# Altium PCB MainBoard.PcbDoc (part 2 of 5)
Units mm, origin at the board's own origin, x right, y up, seen from the top; angles counter-clockwise.
Board outline 82.5 x 82.5 mm, 2 copper layers (Top Layer, Bottom Layer); 145 components, 141 nets, 702 pads, 289 vias.
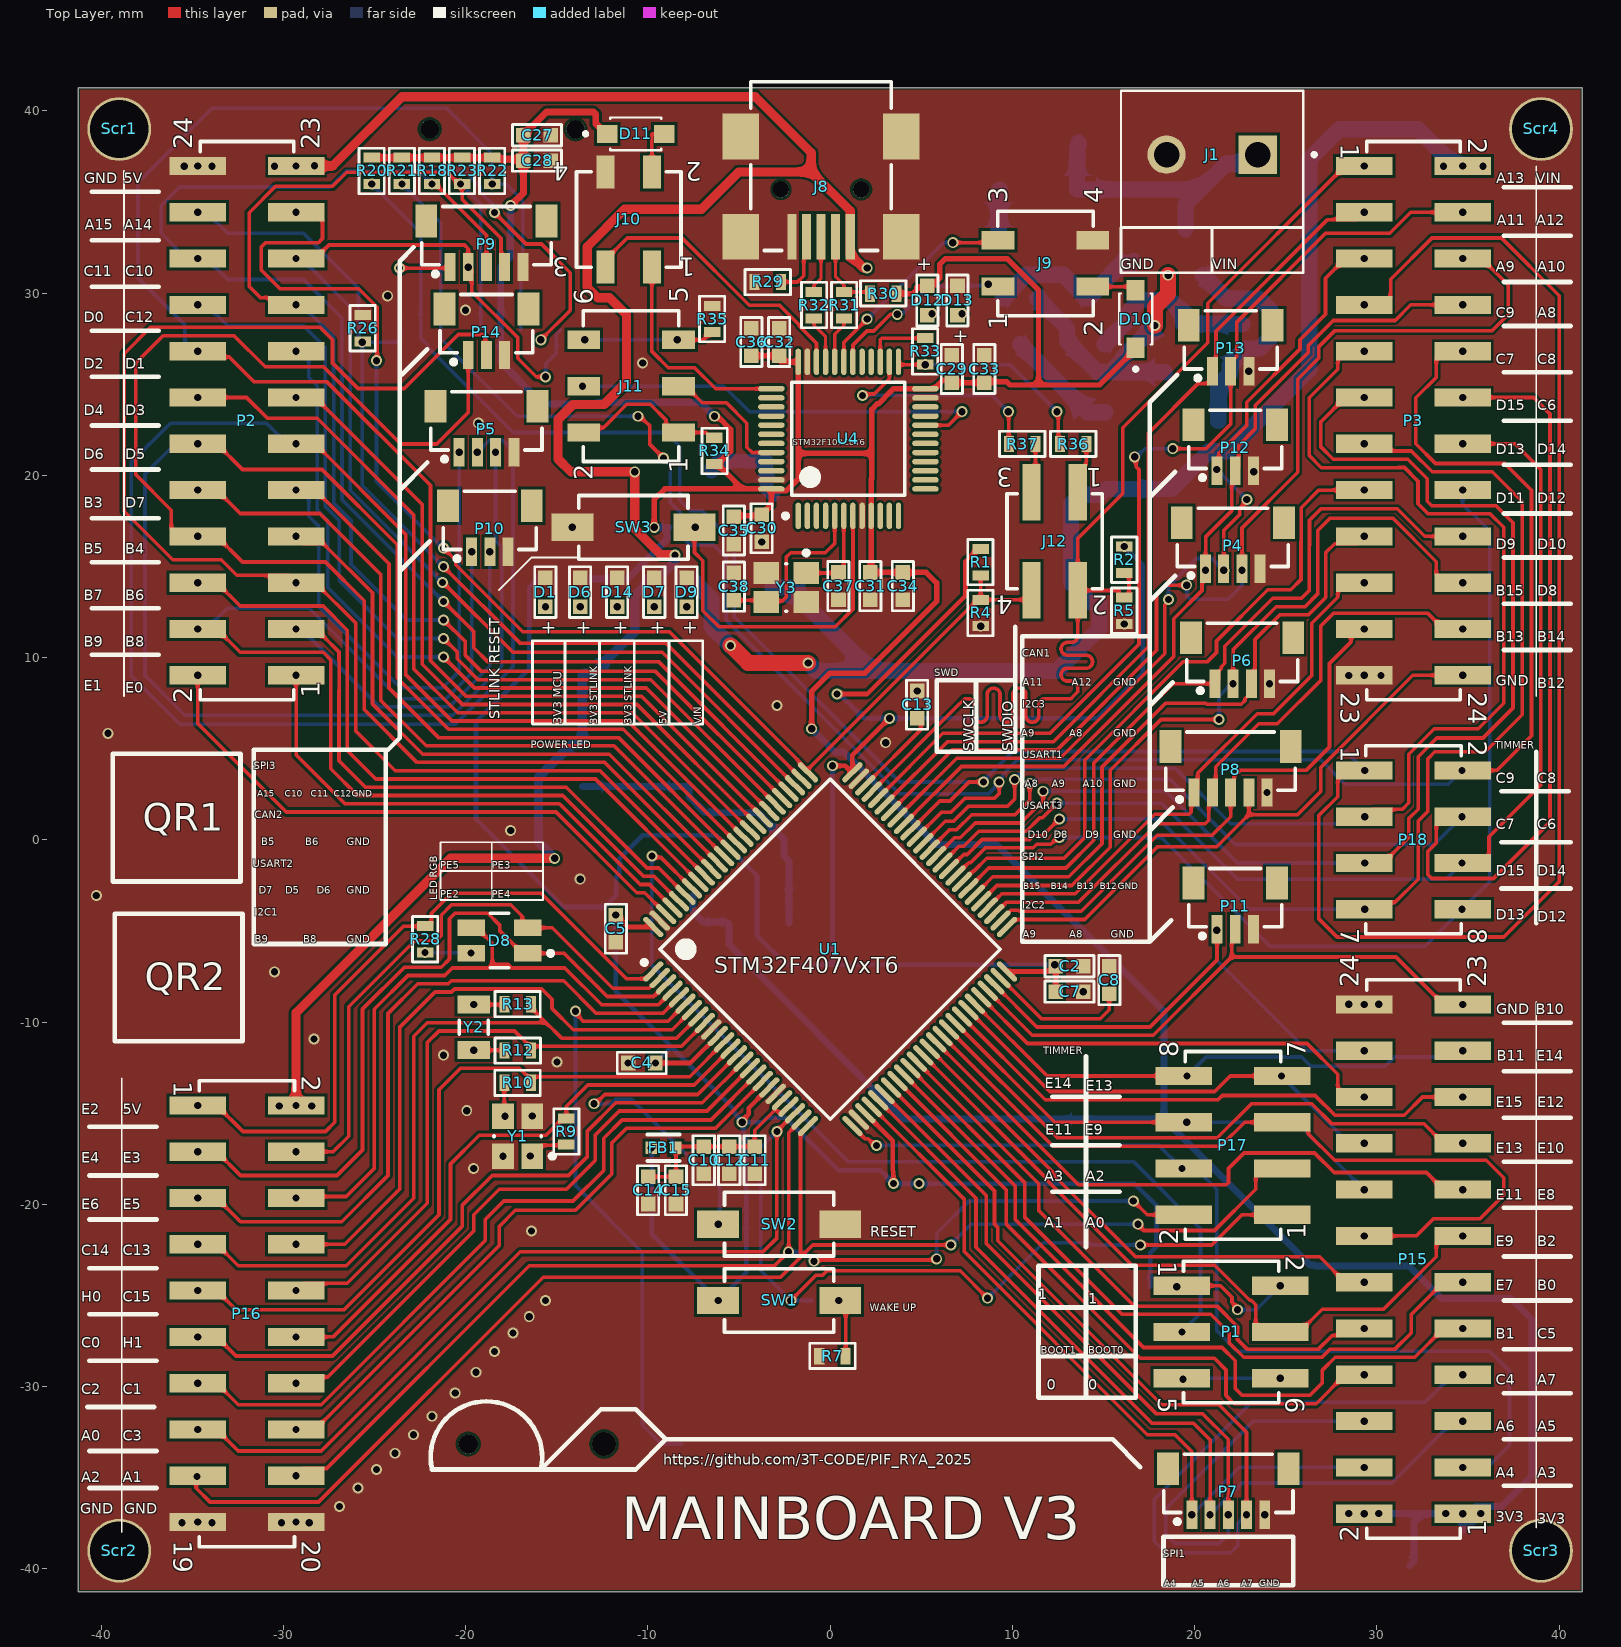
[diagram p0: Top Layer view]

## Part data (continued)
D14: library part CMP-004-00093-1, "WL-SMCW SMT Mono-color Chip LED Blur, size 0603, Red, 2V, 140deg", Color=Red, Component Type=Standard, ComponentLink1Description="Datasheet link", ComponentLink1URL=N/A, ComponentLink2Description="Supplier 1 URL", ComponentLink2URL=https://www.mouser.vn/ProductDetail/ROHM-Semiconductor/CSL1901VW1?qs=vvQtp7zwQdNmrXZcE27xEA%3D%3D, ComponentLink3Description="Supplier 2 URL", ComponentLink3URL=https://www.digikey.com/en/products/detail/rohm-semiconductor/SML-D12U8WT86/1641799, ComponentLink4Description="Supplier 3 URL", ComponentLink4URL=N/A, Design Item ID=160603RedBlur, Pins=2, Size=0603, Source=WL-SMCW_0603.SchLib, Supplier 1 Name=Mouser, Supplier 1 SN=755-CSL1901VW1, Supplier 1 URL=https://www.mouser.vn/ProductDetail/ROHM-Semiconductor/CSL1901VW1?qs=vvQtp7zwQdNmrXZcE27xEA%3D%3D, Supplier 2 Name=Digi-Key, Supplier 2 SN=511-1580-2-ND, Supplier 2 URL=https://www.digikey.com/en/products/detail/rohm-semiconductor/SML-D12U8WT86/1641799, Supplier 3 Name=ICDayRoi, Supplier 3 SN=N/A, Supplier 3 URL=N/A, Type=Blur
F1: library part CMP-005-00054-1, "Resettable Fuse, Size 1812, 16V, 1.1A", Hold Current=1.1A, Manufacturer=Bourns, Threshold Current=100A, Threshold Voltage=16V, Trip Current=2.2A, Component Type=Standard, ComponentLink1Description="Datasheet link", ComponentLink1URL=https://www.bourns.com/docs/Product-Datasheets/mfnsmf.pdf, ComponentLink2Description="Supplier 1 URL", ComponentLink2URL=https://www.mouser.vn/ProductDetail/Bourns/MF-MSMF110-16-2?qs=wksszfECgvir54ST3ixUHA%3D%3D, ComponentLink3Description="Supplier 2 URL", ComponentLink3URL=https://www.digikey.com/en/products/detail/bourns-inc/MF-MSMF110-16-2/662820, ComponentLink4Description="Supplier 3 URL", ComponentLink4URL=https://www.thegioiic.com/mf-msmf110-16-2-cau-chi-tu-phuc-hoi-1812-16v-1-1a, Design Item ID=061812110016, Mounting Technology=SMT/SMD, Pins=2, Size=1812, Source=Fuse_SMD.SchLib, Supplier 1 Name=Mouser, Supplier 1 SN=652-MF-MSMF110/16-2, Supplier 1 URL=https://www.mouser.vn/ProductDetail/Bourns/MF-MSMF110-16-2?qs=wksszfECgvir54ST3ixUHA%3D%3D, Supplier 2 Name=Digi-Key, Supplier 2 SN=MF-MSMF110/16-2TR-ND, Supplier 2 URL=https://www.mouser.vn/ProductDetail/Bourns/MF-MSMF110-16-2?qs=wksszfECgvir54ST3ixUHA%3D%3D, Supplier 3 Name=thegioiic, Supplier 3 SN=MF-MSMF110/16-2, Supplier 3 URL=https://www.thegioiic.com/mf-msmf110-16-2-cau-chi-tu-phuc-hoi-1812-16v-1-1a
F2: library part CMP-005-00051-1, "Resettable Fuse, Size 1812, 15V, 0.5A", Hold Current=0.5A, Manufacturer=Bourns, Threshold Current=100A, Threshold Voltage=15V, Trip Current=1A, Component Type=Standard, ComponentLink1Description="Datasheet link", ComponentLink1URL=https://www.bourns.com/docs/Product-Datasheets/mfnsmf.pdf, ComponentLink2Description="Supplier 1 URL", ComponentLink2URL=https://www.mouser.vn/ProductDetail/Bourns/MF-MSMF050-2?qs=t3shhpq1i1DZ7OBD5kLNoA%3D%3D, ComponentLink3Description="Supplier 2 URL", ComponentLink3URL=https://www.digikey.com/en/products/detail/bourns-inc/MF-MSMF050-2/662816?s=N4IgTCBcDaILIDEC0cDKiAMBWDSIF0BfIA, ComponentLink4Description="Supplier 3 URL", ComponentLink4URL=https://www.thegioiic.com/mf-msmf050-2-cau-chi-tu-phuc-hoi-1812-15v-0-5a, Design Item ID=061812050015, Mounting Technology=SMT/SMD, Pins=2, Size=1812, Source=Fuse_SMD.SchLib, Supplier 1 Name=Mouser, Supplier 1 SN=652-MF-MSMF050-2, Supplier 1 URL=https://www.mouser.vn/ProductDetail/Bourns/MF-MSMF050-2?qs=t3shhpq1i1DZ7OBD5kLNoA%3D%3D, Supplier 2 Name=Digi-Key, Supplier 2 SN=MF-MSMF050-2TR-ND, Supplier 2 URL=https://www.mouser.vn/ProductDetail/Bourns/MF-MSMF050-2?qs=t3shhpq1i1DZ7OBD5kLNoA%3D%3D, Supplier 3 Name=thegioiic, Supplier 3 SN=MF-MSMF050-2, Supplier 3 URL=https://www.thegioiic.com/mf-msmf050-2-cau-chi-tu-phuc-hoi-1812-15v-0-5a
F3: library part CMP-005-00048-1, "Resettable Fuse, Size 1206, 6V, 0.35A", Hold Current=0.35A, Manufacturer=Bourns, Threshold Current=100A, Threshold Voltage=6V, Trip Current=0.75A, Component Type=Standard, ComponentLink1Description="Datasheet link", ComponentLink1URL=https://www.bourns.com/docs/Product-Datasheets/mfnsmf.pdf, ComponentLink2Description="Supplier 1 URL", ComponentLink2URL=https://www.mouser.vn/ProductDetail/Bourns/MF-NSMF035-2?qs=3eVyCPG4fwnHDrvs%2FGppSw%3D%3D, ComponentLink3Description="Supplier 2 URL", ComponentLink3URL=https://www.digikey.com/en/products/detail/bourns-inc/MF-NSMF035-2/1232784?s=N4IgTCBcDaILIDEC0A5AyogDAZgKxIgF0BfIA, ComponentLink4Description="Supplier 3 URL", ComponentLink4URL=https://www.thegioiic.com/mf-nsmf035-2-cau-chi-tu-phuc-hoi-1206-6v-0-35a, Design Item ID=061206035006, Mounting Technology=SMT/SMD, Pins=2, Size=1206, Source=Fuse_SMD.SchLib, Supplier 1 Name=Mouser, Supplier 1 SN=652-MF-NSMF035-2, Supplier 1 URL=https://www.mouser.vn/ProductDetail/Bourns/MF-NSMF035-2?qs=3eVyCPG4fwnHDrvs%2FGppSw%3D%3D, Supplier 2 Name=Digi-Key, Supplier 2 SN=MF-NSMF035-2TR-ND, Supplier 2 URL=https://www.mouser.vn/ProductDetail/Bourns/MF-NSMF035-2?qs=3eVyCPG4fwnHDrvs%2FGppSw%3D%3D, Supplier 3 Name=thegioiic, Supplier 3 SN=MF-NSMF035-2, Supplier 3 URL=https://www.thegioiic.com/mf-nsmf035-2-cau-chi-tu-phuc-hoi-1206-6v-0-35a
F4: library part CMP-005-00050-1, "Resettable Fuse, Size 1812, 30V, 0.2A", Hold Current=0.2A, Manufacturer=Bourns, Threshold Current=80A, Threshold Voltage=30V, Trip Current=0.4A, Component Type=Standard, ComponentLink1Description="Datasheet link", ComponentLink1URL=https://www.bourns.com/docs/Product-Datasheets/mfnsmf.pdf, ComponentLink2Description="Supplier 1 URL", ComponentLink2URL=https://www.mouser.vn/ProductDetail/Bourns/MF-MSMF020-2?qs=YYkh393lUtjbPn24kFIUNQ%3D%3D, ComponentLink3Description="Supplier 2 URL", ComponentLink3URL=https://www.digikey.com/en/products/detail/bourns-inc/MF-MSMF020-2/662814?s=N4IgTCBcDaILIDEC0cDKiAMYNLAAhAF0BfIA, ComponentLink4Description="Supplier 3 URL", ComponentLink4URL=https://www.thegioiic.com/mf-msmf020-2-cau-chi-tu-phuc-hoi-1812-0-20a-30v, Design Item ID=061812020030, Mounting Technology=SMT/SMD, Pins=2, Size=1812, Source=Fuse_SMD.SchLib, Supplier 1 Name=Mouser, Supplier 1 SN=652-MF-MSMF020-2, Supplier 1 URL=https://www.mouser.vn/ProductDetail/Bourns/MF-MSMF020-2?qs=YYkh393lUtjbPn24kFIUNQ%3D%3D, Supplier 2 Name=Digi-Key, Supplier 2 SN=MF-MSMF020-2TR-ND, Supplier 2 URL=https://www.mouser.vn/ProductDetail/Bourns/MF-MSMF020-2?qs=YYkh393lUtjbPn24kFIUNQ%3D%3D, Supplier 3 Name=thegioiic, Supplier 3 SN=MF-MSMF020-2, Supplier 3 URL=https://www.thegioiic.com/mf-msmf020-2-cau-chi-tu-phuc-hoi-1812-0-20a-30v
FB1: library part CMP-006-00234-1, "Ferrite Chip, 1 Function(s), 2A, 2 Pin(s)", Current Rating=2A, DC Resistance-Max=50mR, Max Operating Temperature=125°C, Min Operating Temperature=-55°C, Height=0.8mm, Length=1.6mm, Material=Ferrite, Packaging="Tape and Reel", RoHS Compliant=Yes, Width=0.8mm
J1: library part CMP-118-000001-1, "2 Pin Terminal Block 5mm Pitch", Package=None, Availability=Unavailable, Design Item ID=KF301-2P, MP=KF301-2P, Price=None, Source=KF301-2P.SchLib
J2: library part CMP-00029-00003-1, "Coin Cell Battery Retainer, Horizontal SMT, for CR1220 Coin Cell Batteries, Tape & Reeled", Case/Package=None, Check_prices=https://www.snapeda.com/parts/S8411-45R/Harwin+Inc./view-part/?ref=eda, Component Type=Standard, Design Item ID=S8411-45R, MF=Harwin, MP=S8411-45R, Pins=2, SnapEDA_Link=https://www.snapeda.com/parts/S8411-45R/Harwin+Inc./view-part/?ref=snap, Source=S8411-45R.SchLib
J3 J4 J6: library part CMP-002-00462-1, "WR-PHD Socket Header, SMT, pitch 2.54mm, Dual Row, Vertical, 24p", Contact Resistance=20mOhm, Manufacturer="Wurth Elektronik", Operating Temperature="-40 to +105degC", Rated Current=3A, Withstanding Voltage=600VAC, Working Voltage=250VAC, Component Type=Standard, ComponentLink1Description=Manufacturer, ComponentLink1URL=http://www.we-online.de, ComponentLink2Description=Datasheet, ComponentLink2URL=https://www.we-online.com/catalog/datasheet/61032421821.pdf, ComponentLink3Description="Global Supply", ComponentLink3URL=https://www.we-online.com/en/components/products/PHD_2_54_SMT_DUAL_SOCKET_HEADER_6100XX21821?sq=61032421821#61032421821, ComponentLink4Description="Global Supply", ComponentLink4URL=https://www.mouser.vn/ProductDetail/Wurth-Elektronik/61032421821?qs=Cb2nCFKsA8olwuXV8WYPMw%3D%3D, Design Item ID=61032421821, Gender="Socket Header", Manufacturer Part Number=61032421821, Mounting Technology=SMT, Orientation=Vertical, Packaging="Tape and Reel", Pin Number=24, Pins=24, Pitch=2.54mm, Published Date="May 2020", Row Number=Dual, Source="WR-PHD_Socket Header_2.54mm.SchLib", Supplier 1 Name=Mouser, Supplier 1 SN=710-61032421821, Supplier 1 URL=https://www.mouser.vn/ProductDetail/Wurth-Elektronik/61032421821?qs=Cb2nCFKsA8olwuXV8WYPMw%3D%3D, Supplier 2 Name=Digi-Key, Supplier 2 SN=N/A, Supplier 2 URL=N/A, Supplier 3 Name=thegioiic, Supplier 3 SN=N/A, Supplier 3 URL=N/A
J5: library part CMP-002-01571-2, "Micro SD Card Connector, 9 Positions, Connector and Ejector, Push In, Auto Eject Out, Surface Mount, 1.8 mm Height Above Board, Gold Flash", Case/Package=None, Check_prices=https://www.snapeda.com/parts/MSD-4-A/CUI+Devices/view-part/?ref=eda, Component Type=Standard, CUI_purchase_URL=https://www.cuidevices.com/product/interconnect/connectors/memory-card-connectors/sd-card-connectors/msd-4-a?utm_source=snapeda.com&utm_medium=referral&utm_campaign=snapedaBOM, Design Item ID=MSD-4-A, MF="CUI Devices", MP=MSD-4-A, Pins=13, SnapEDA_Link=https://www.snapeda.com/parts/MSD-4-A/CUI+Devices/view-part/?ref=snap, Source=MSD-4-A.SchLib
J7: library part CMP-002-00459-1, "WR-PHD Socket Header, SMT, pitch 2.54mm, Dual Row, Vertical, 20p", Contact Resistance=20mOhm, Manufacturer="Wurth Elektronik", Operating Temperature="-40 to +105degC", Rated Current=3A, Withstanding Voltage=600VAC, Working Voltage=250VAC, Component Type=Standard, ComponentLink1Description=Manufacturer, ComponentLink1URL=http://www.we-online.de, ComponentLink2Description=Datasheet, ComponentLink2URL=https://www.we-online.com/catalog/datasheet/61032021821.pdf, ComponentLink3Description="Global Supply", ComponentLink3URL=https://www.we-online.com/en/components/products/PHD_2_54_SMT_DUAL_SOCKET_HEADER_6100XX21821?sq=61032021821#61032021821, ComponentLink4Description="Global Supply", ComponentLink4URL=https://www.mouser.vn/ProductDetail/Wurth-Elektronik/61032021821?qs=Cb2nCFKsA8rLJ0ZbRtJw1w%3D%3D, Design Item ID=61032021821, Gender="Socket Header", Manufacturer Part Number=61032021821, Mounting Technology=SMT, Orientation=Vertical, Packaging="Tape and Reel", Pin Number=20, Pins=20, Pitch=2.54mm, Published Date="May 2020", Row Number=Dual, Source="WR-PHD_Socket Header_2.54mm.SchLib", Supplier 1 Name=Mouser, Supplier 1 SN=710-61032021821, Supplier 1 URL=https://www.mouser.vn/ProductDetail/Wurth-Elektronik/61032021821?qs=Cb2nCFKsA8rLJ0ZbRtJw1w%3D%3D, Supplier 2 Name=Digi-Key, Supplier 2 SN=N/A, Supplier 2 URL=N/A, Supplier 3 Name=thegioiic, Supplier 3 SN=N/A, Supplier 3 URL=N/A